# EAGLE board board 3 (EAGLE 5.06)
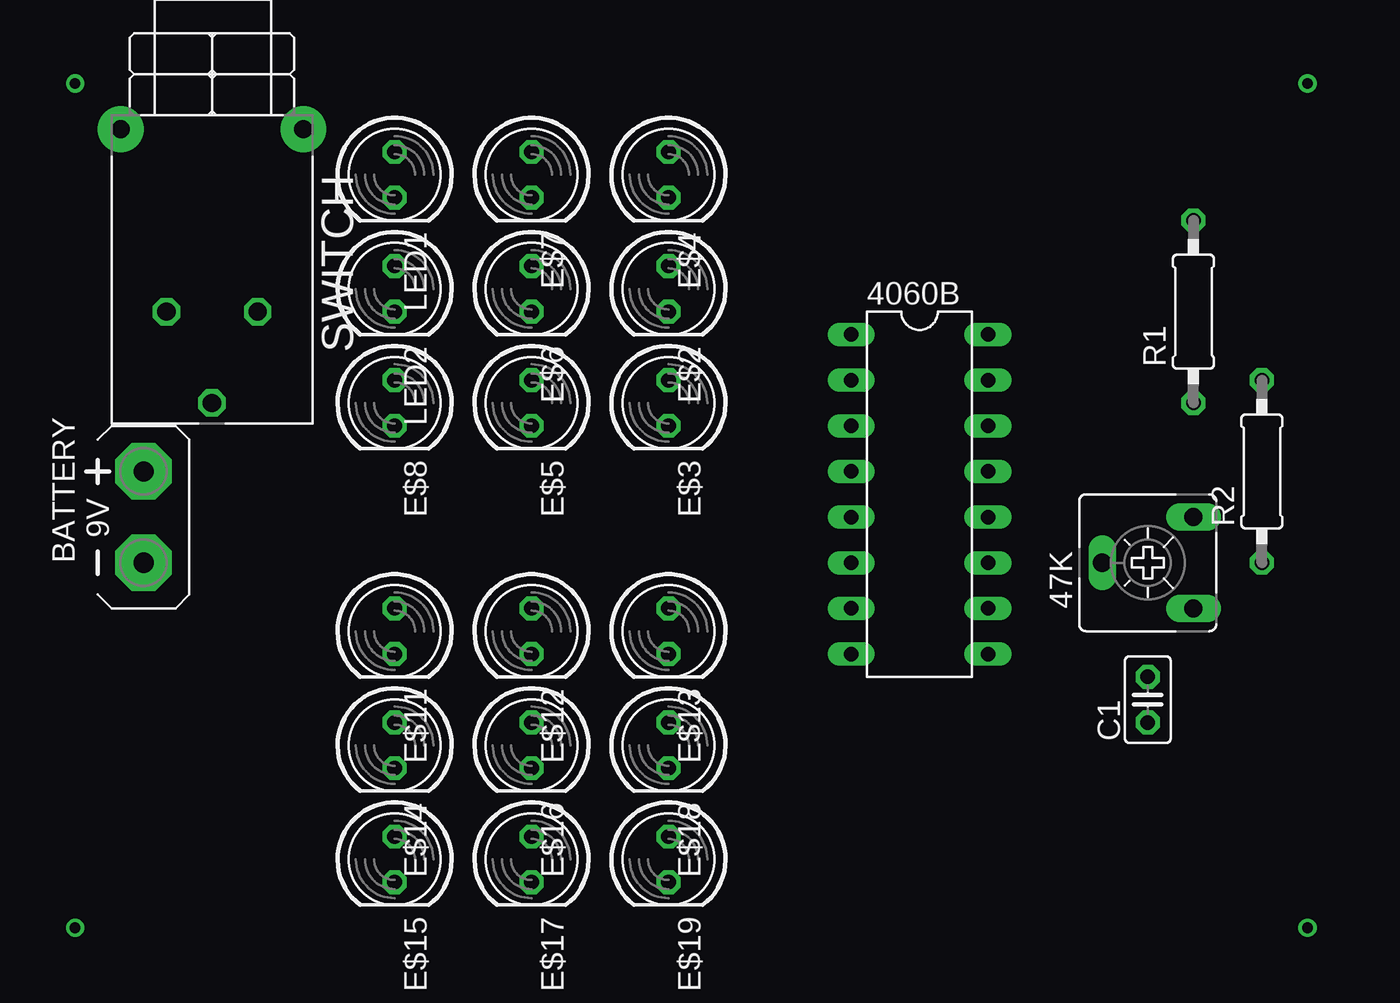
[diagram p0: board, top side]
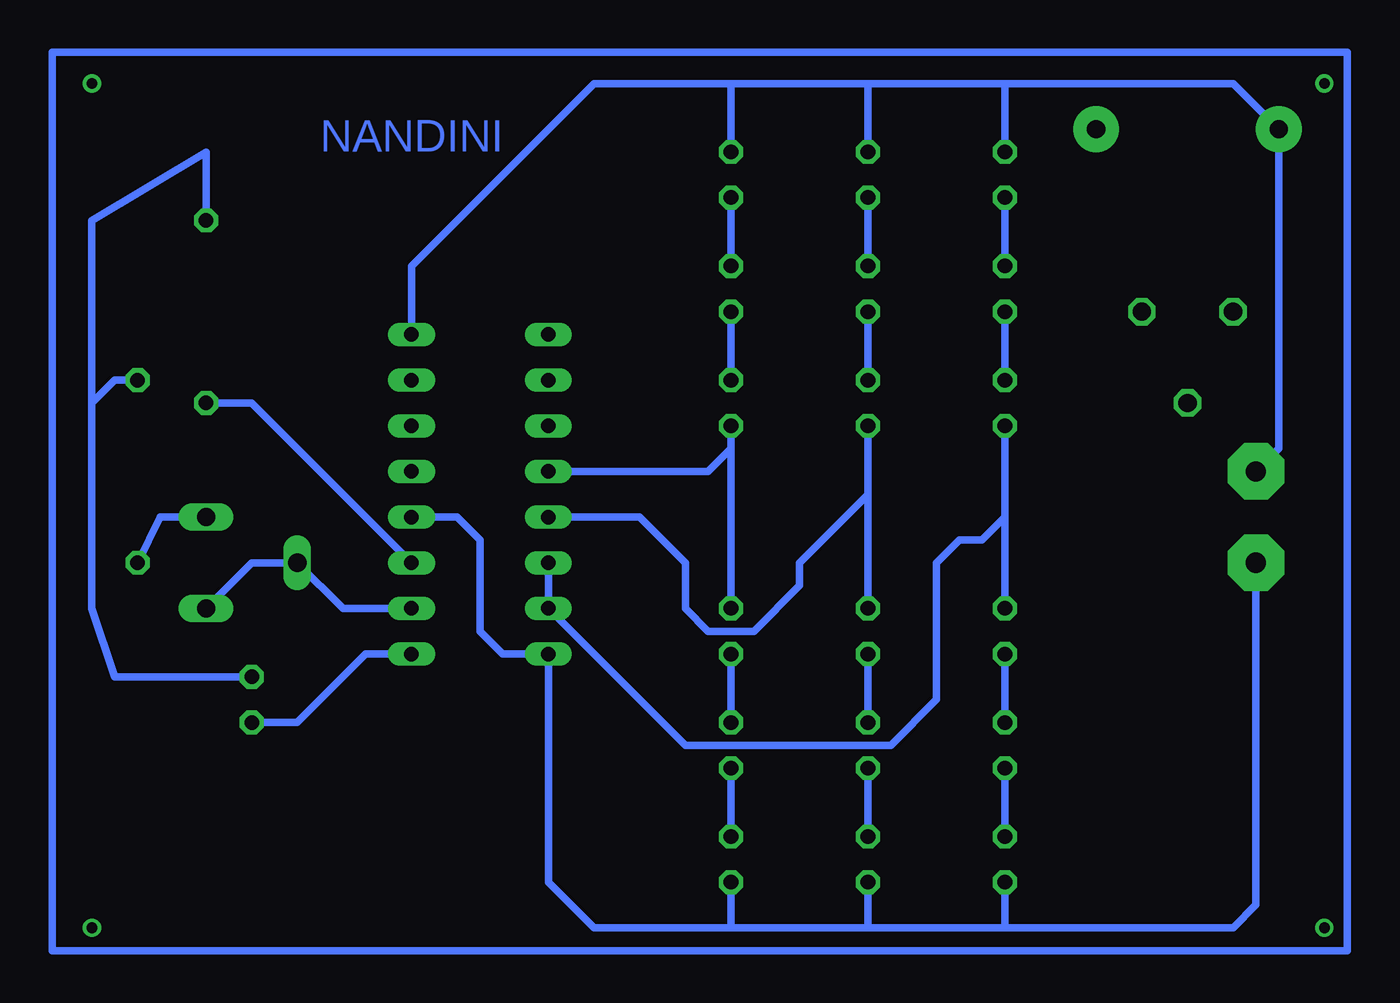
[diagram p1: board, bottom side, seen from below]

No outline drawn. Coordinates in mm, seen from the top.
Copper layers (1*16): Top 0.035mm / dielectric 1.5mm / Bottom 0.035mm
Design rules "default": minimum track width 10mil, minimum drill 24mil, track to track 8mil, track to pad 8mil, pad to pad 8mil, via to via 8mil, smd to smd 8mil, copper to edge 40mil, drill to drill 8mil, minimum pad ring 10mil, minimum via ring 8mil, stop-mask expansion 4mil, vias tented up to drill 0mil, thermal gap 10mil

## Footprints (pad centres in the part's own frame; a part is rotated, then mirrored left to right if it is on the bottom)
CA6V = drill 1.016 long: A -2.54,-2.54; E 2.54,-2.54; S 0,2.54
DIL16 = drill 0.813 long: 1 -8.89,-3.81; 2 -6.35,-3.81; 3 -3.81,-3.81; 4 -1.27,-3.81; 5 1.27,-3.81; 6 3.81,-3.81; 7 6.35,-3.81; 8 8.89,-3.81; 9 8.89,3.81; 10 6.35,3.81; 11 3.81,3.81; 12 1.27,3.81; 13 -1.27,3.81; 14 -3.81,3.81; 15 -6.35,3.81; 16 -8.89,3.81
AB9V = drill 1.118 pad 3.15 octagon: + 0,2.54; - 0,-2.54
C025-025X050 = drill 0.813 octagon: 1 -1.27,0; 2 1.27,0
LED5MM = drill 0.813 octagon: A -1.27,0; K 1.27,0
0207/10 = drill 0.813 octagon: 1 -5.08,0; 2 5.08,0
316-917 = drill 1.016 octagon: 1 10.16,2.54; 2 15.24,0; 3 10.16,-2.54 | drill 1.016 pad 2.54 round: B 0,-5.08; B1 0,5.08

## Placement (x,y rotation side)
47K  47k  [CA6V]  60.96,21.59 90 top
4060B  [DIL16]  48.26,25.4 270 top
BATTERY  [AB9V]  5.08,24.13 0 top
C1  UF  [C025-025X050]  60.96,13.97 90 top
E$2  [LED5MM]  34.29,36.83 270 top
E$3  [LED5MM]  34.29,30.48 270 top
E$4  [LED5MM]  34.29,43.18 270 top
E$5  [LED5MM]  26.67,30.48 270 top
E$6  [LED5MM]  26.67,36.83 270 top
E$7  [LED5MM]  26.67,43.18 270 top
E$8  [LED5MM]  19.05,30.48 270 top
E$11  [LED5MM]  19.05,17.78 270 top
E$12  [LED5MM]  26.67,17.78 270 top
E$13  [LED5MM]  34.29,17.78 270 top
E$14  [LED5MM]  19.05,11.43 270 top
E$15  [LED5MM]  19.05,5.08 270 top
E$16  [LED5MM]  26.67,11.43 270 top
E$17  [LED5MM]  26.67,5.08 270 top
E$18  [LED5MM]  34.29,11.43 270 top
E$19  [LED5MM]  34.29,5.08 270 top
LED1  [LED5MM]  19.05,43.18 270 top
LED2  [LED5MM]  19.05,36.83 270 top
R1  470K  [0207/10]  63.5,35.56 90 top
R2  10K  [0207/10]  67.31,26.67 90 top
SWITCH  [316-917]  8.89,45.72 270 top

## Library data of the parts
47K = pot
4060B = ic-package
BATTERY = battery
C1 R1 R2 = resistor
E$2-E$8 E$11-E$19 LED1 LED2 = led
SWITCH = switch

## Nets
POT: 47K.A 47K.S 4060B.10
S$2: 4060B.8 4060B.12 BATTERY.- E$15.K E$17.K E$19.K
S$3: 4060B.4 E$3.K E$13.A
S$4: E$2.K E$3.A
S$5: E$2.A E$4.K
S$7: E$13.K E$18.A
S$8: E$18.K E$19.A
S$9: 4060B.5 E$5.K E$12.A
S$10: E$5.A E$6.K
S$11: E$6.A E$7.K
S$12: E$12.K E$16.A
S$13: E$16.K E$17.A
S$14: 4060B.6 E$8.K E$11.A
S$15: E$11.K E$14.A
S$16: E$14.K E$15.A
S$17: E$8.A LED2.K
S$18: LED1.K LED2.A
S$19: 4060B.16 BATTERY.+ E$4.A E$7.A LED1.A SWITCH.B
S$20: 4060B.9 C1.1
S$21: C1.2 R1.2 R2.2
S$23: 47K.E R2.1
S$24: 4060B.11 R1.1

## Tracks (layer width: path | path; a pad name or v marks a point on that pad's centre or on a via)
POT
  Bottom 0.406: 4060B.10 55.88,19.05 47K.S 60.96,21.59 47K.A
S$1
  Bottom 0.406: 0,0 72.06,0 72.06,50 0,50 0,0
S$2
  Bottom 0.406: 4060B.12 49.53,24.13 48.26,22.86 48.26,17.78 46.99,16.51 4060B.8 44.45,3.81 41.91,1.27 34.29,1.27 | 19.05,1.27 6.35,1.27 5.08,2.54 BATTERY.- | 19.05,1.27 26.67,1.27 | 26.67,1.27 34.29,1.27 | 34.29,1.27 E$19.K | 26.67,1.27 E$17.K | 19.05,1.27 E$15.K
S$3
  Bottom 0.406: E$3.K 34.29,27.94 | 4060B.4 35.56,26.67 34.29,27.94 | 34.29,27.94 E$13.A
S$4
  Bottom 0.406: E$3.A E$2.K
S$5
  Bottom 0.406: E$2.A E$4.K
S$6  (via drill 0.6)
  other vias: 1.27,48.26
S$7
  Bottom 0.406: E$13.K E$18.A
S$8
  Bottom 0.406: E$18.K E$19.A
S$9
  Bottom 0.406: 4060B.5 39.37,24.13 36.83,21.59 36.83,19.05 35.56,17.78 33.02,17.78 30.48,20.32 30.48,21.59 26.67,25.4 | 26.67,25.4 E$5.K | 26.67,25.4 E$12.A
S$10
  Bottom 0.406: E$5.A E$6.K
S$11
  Bottom 0.406: E$6.A E$7.K
S$12
  Bottom 0.406: E$12.K E$16.A
S$13
  Bottom 0.406: E$16.K E$17.A
S$14
  Bottom 0.406: 4060B.6 44.45,19.05 36.83,11.43 25.4,11.43 22.86,13.97 22.86,21.59 21.59,22.86 20.32,22.86 19.05,24.13 | 19.05,24.13 E$8.K | 19.05,24.13 E$11.A
S$15
  Bottom 0.406: E$11.K E$14.A
S$16
  Bottom 0.406: E$14.K E$15.A
S$17
  Bottom 0.406: E$8.A LED2.K
S$18
  Bottom 0.406: LED2.A LED1.K
S$19
  Bottom 0.406: 4060B.16 52.07,38.1 41.91,48.26 31.75,48.26 | E$4.A 34.29,48.26 31.75,48.26 | 26.67,48.26 31.75,48.26 | 26.67,48.26 E$7.A | 19.05,48.26 26.67,48.26 | 19.05,48.26 LED1.A | 19.05,48.26 6.35,48.26 SWITCH.B 3.81,27.94 BATTERY.+
S$20
  Bottom 0.406: 4060B.9 54.61,16.51 58.42,12.7 C1.1
S$21
  Bottom 0.406: 69.85,30.48 69.85,40.64 63.5,44.45 R1.2 | 69.85,30.48 69.85,19.05 68.58,15.24 C1.2 | R2.2 68.58,31.75 69.85,30.48
S$23
  Bottom 0.406: 47K.E 66.04,24.13 R2.1
S$24
  Bottom 0.406: R1.1 60.96,30.48 4060B.11
S$27  (via drill 0.6)
  other vias: 1.27,1.27
S$28  (via drill 0.6)
  other vias: 69.85,1.27
S$29  (via drill 0.6)
  other vias: 69.85,48.26

## Text on the board
Bottom: NANDINI